# Altium PCB V_9.PcbDoc
Units mm, origin at the board's own origin, x right, y up, seen from the top; angles counter-clockwise.
Board outline 152.4 x 101.6 mm, 2 copper layers (Top Layer, Bottom Layer); 6 components, 12 nets, 99 pads, 1 vias.
Unrouted connection lines stored in the file: 1.
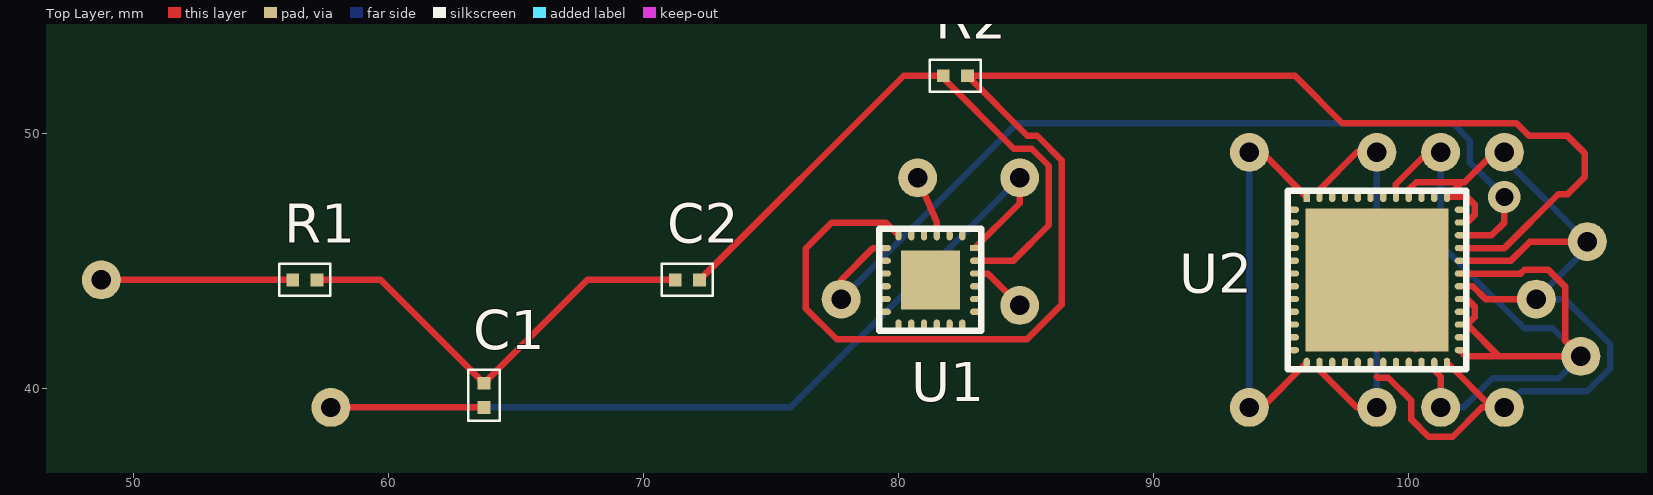
[diagram p0: Top Layer view]
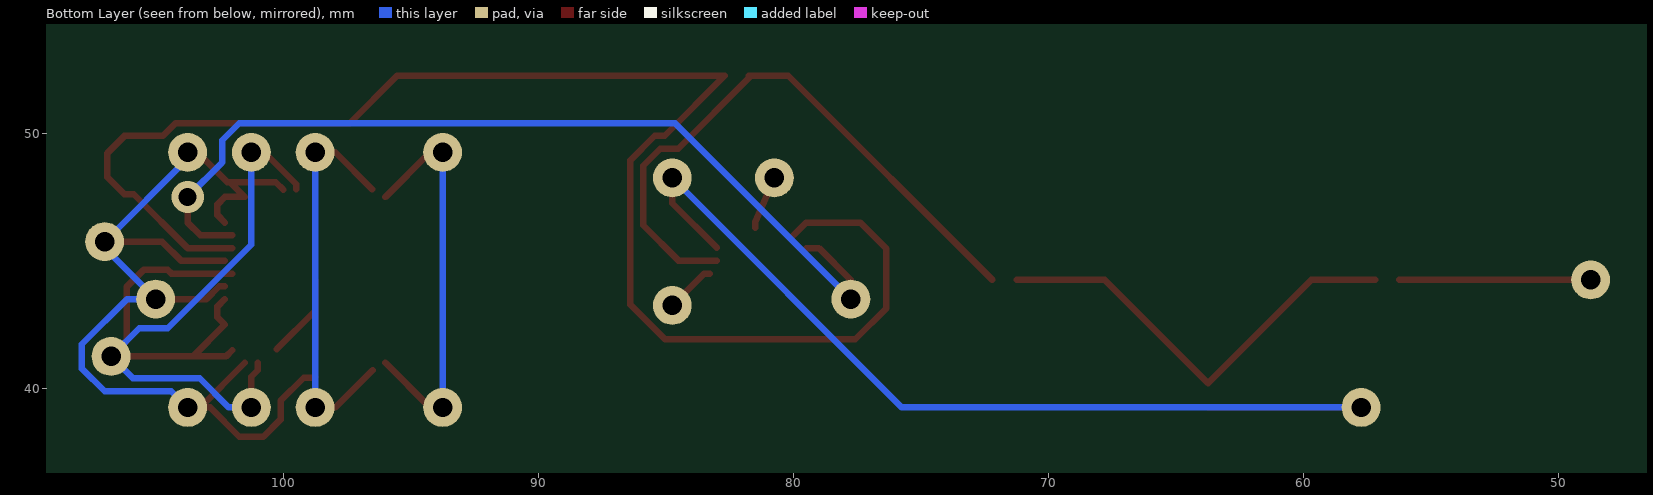
[diagram p1: Bottom Layer view, seen from below]

## Layer stack, top to bottom
Top Layer: signal copper 0.0356
Dielectric: dielectric 0.32, FR-4, Dk 4.8
Bottom Layer: signal copper 0.0356

## Board outline
25.4,25.4 177.8,25.4 177.8,127 25.4,127

## Design rules (kind name [scope] priority, off if disabled: settings)
Clearance [All] p1: gap=0.254
PolygonConnect [All] p1: connectstyle=Relief reliefconductorwidth=0.254 reliefentries=4 polygonreliefangle="90 Angle" airgapwidth=0.254
RoutingVias [All] p1: holewidth=0.711 width=1.27 viastyle="Through Hole" minholewidth=0.711 minwidth=1.27 maxholewidth=0.711 maxwidth=1.27
SilkscreenOverComponentPads [All] p1: minsilkscreentomaskgap=0.254
SolderMaskExpansion [All] p1: expansion=0.102
Width [All] p1: maxlimit=0.254 minlimit=0.254 preferedwidth=0.254
27 further rules are at their usual default settings.

## Classes and differential pairs
component class V_6: C1 C2 R2 U1 U2

## Components (designator, comment, footprint, x,y, rotation, side; value= is the part's Value field where it differs from the comment)
C1 "2 pF" C_0805 63.75,39.25 r90 top
C2 "2 pF" C_0805 71.25,44.25 r0 top
R1 "8.2k" R_0805 56.25,44.25 r0 top
R2 "2.4k" R_0805 81.75,52.25 r0 top
U1 "" ADA4932-2 81.25,44.25 r0 top
U2 "" ads61b49 98.75,44.25 r0 top

## Footprints (in the part's own frame and the unit in brackets; to place one, negate y for a bottom-side part, rotate by r counter-clockwise, add the part's x,y. Pads: shape width x height; smd on the part's side, far side on the other; paste and mask are expansions set on the pad)
ADA4932-2 [mm]
  rect 0.4x0.25 smd: 1(1.75,1.25)
  oval 0.4x0.25 smd: 2(1.75,0.75) 3(1.75,0.25) 4(1.75,-0.25) 5(1.75,-0.75) 6(1.75,-1.25) 13(-1.75,-1.25) 14(-1.75,-0.75) 15(-1.75,-0.25) 16(-1.75,0.25) 17(-1.75,0.75) 18(-1.75,1.25)
  oval 0.25x0.4 smd: 7(1.25,-1.75) 8(0.75,-1.75) 9(0.25,-1.75) 10(-0.25,-1.75) 11(-0.75,-1.75) 12(-1.25,-1.75) 19(-1.25,1.75) 20(-0.75,1.75) 21(-0.25,1.75) 22(0.25,1.75) 23(0.75,1.75) 24(1.25,1.75)
  rect 2.3x2.3 smd: ADA(0,0)
  silkscreen extent -2,-2 2,2
ads61b49 [mm]
  rect 0.25x0.4 smd: 1(-2.75,3.25)
  oval 0.25x0.4 smd: 2(-2.25,3.25) 3(-1.75,3.25) 4(-1.25,3.25) 5(-0.75,3.25) 6(-0.25,3.25) 7(0.25,3.25) 8(0.75,3.25) 9(1.25,3.25) 10(1.75,3.25) 11(2.25,3.25) 12(2.75,3.25) 25(2.75,-3.25) 26(2.25,-3.25) 27(1.75,-3.25) 28(1.25,-3.25) 29(0.75,-3.25) 30(0.25,-3.25) 31(-0.25,-3.25) 32(-0.75,-3.25) 33(-1.25,-3.25) 34(-1.75,-3.25) 35(-2.25,-3.25) 36(-2.75,-3.25)
  oval 0.4x0.25 smd: 13(3.25,2.75) 14(3.25,2.25) 15(3.25,1.75) 16(3.25,1.25) 17(3.25,0.75) 18(3.25,0.25) 19(3.25,-0.25) 20(3.25,-0.75) 21(3.25,-1.25) 22(3.25,-1.75) 23(3.25,-2.25) 24(3.25,-2.75) 37(-3.25,-2.75) 38(-3.25,-2.25) 39(-3.25,-1.75) 40(-3.25,-1.25) 41(-3.25,-0.75) 42(-3.25,-0.25) 43(-3.25,0.25) 44(-3.25,0.75) 45(-3.25,1.25) 46(-3.25,1.75) 47(-3.25,2.25) 48(-3.25,2.75)
  rect 5.6x5.6 smd: 49(0,0)
  silkscreen extent -3.5,-3.5 3.5,3.5
C_0805 [mm]
  rect 0.5x0.5 smd: 1(0,0) 2(0.95,0)
  silkscreen extent -0.53,-0.63 1.48,0.63
R_0805 [mm]
  rect 0.5x0.5 smd: 1(0,0) 2(0.95,0)
  silkscreen extent -0.53,-0.63 1.48,0.63

## Part data
C1 C2: library part C
R1 R2: library part R
U1: library part ADA4932-2
U2: library part ADS61B49

## Free pads (board coordinates)
  round 1.524 hole 0.762: 0(77.75,43.5) GND(57.75,39.25) ""(48.75,44.25) ""(80.75,48.25) ""(84.75,43.25) ""(84.75,48.25) ""(93.75,39.25) ""(93.75,49.25) ""(98.75,39.25) ""(98.75,49.25) ""(101.25,39.25) ""(101.25,49.25) ""(103.75,39.25) ""(103.75,49.25) ""(105,43.5) ""(106.75,41.25) ""(107,45.75)

## Via types
v1: diameter 1.27, hole 0.711, Top Layer to Bottom Layer, 1 vias

## Nets (pads, with @x,y where several pads share a name; then routed paths per layer and width w, separated by ;. In a path a pad name is that pad's centre, name@x,y a point inside that pad or via, vN(x,y) a via of type N, cw(c..) or ccw(c..) an arc to the next point about the centre after c; other vN are vias at no path point)
1.8V: pad.@98.75,39.25 pad.@98.75,49.25 U2.2 U2.35 | length 15.7
  Top Layer w0.254: 96.5,40.709 97.959,39.25 pad.@98.75,39.25 ; 96.506,47.797 97.959,49.25 pad.@98.75,49.25
  Bottom Layer w0.254: pad.@98.75,39.25 pad.@98.75,49.25
3.3V: pad.@101.25,39.25 pad.@101.25,49.25 pad.@106.75,41.25 U2.8 U2.18 U2.20 U2.22 U2.24 U2.26 | length 36.9
  Top Layer w0.254: 99.492,47.799 99.492,48.001 100.741,49.25 pad.@101.25,49.25 ; U2.26 101,40.709 101.25,40.459 pad.@101.25,39.25 ; U2.24@102,41.494 102.244,41.25 103.541,41.25 ; U2.18 104.384,44.5 104.527,44.643 105.473,44.643 106.143,43.973 106.143,41.857 106.75,41.25 103.541,41.25 ; 102.299,43.492 102.581,43.21 102.581,42.79 102.291,42.5 103.541,41.25
  Bottom Layer w0.254: pad.@101.25,39.25 102.134,39.25 103.277,40.393 105.893,40.393 106.75,41.25 105.643,42.357 104.527,42.357 101.25,45.634 pad.@101.25,49.25
5V: pad.@84.75,43.25 U1.3 | length 2
  Top Layer w0.254: 83.291,44.5 83.5,44.5 pad.@84.75,43.25
-5V: pad.@80.75,48.25 U1.22 | length 2.1
  Top Layer w0.254: pad.@80.75,48.25 81.5,46.5 81.5,46.291
AGND: pad.@103.75,39.25 pad.@103.75,49.25 pad.@105,43.5 pad.@107,45.75 U2.9 U2.12 U2.14 U2.17 U2.19 U2.25 U2.49 | length 46.6
  Top Layer w0.254: 98.75,40.459 98.79,40.419 99.197,40.419 100.107,39.509 100.107,38.777 100.777,38.107 101.723,38.107 102.866,39.25 pad.@103.258,39.25 ; U2.49@98.75,41.541 U2.49@98.75,43.041 ; U2.49 U2.49@98.75,43.041 ; 100,47.791 100.29,48.081 102.087,48.081 ; U2.49@100.25,41.541 U2.49@98.75,43.041 ; U2.25@101.508,41 pad.@103.258,39.25 ; 102.291,44 102.509,44 103.009,43.5 pad.@105,43.5 ; 102.291,46.5 102.581,46.79 102.581,47.21 102.285,47.506 101.614,47.506 101.608,47.5 101.506,47.5 102.087,48.081 ; 102.299,44.992 103.992,44.992 104.75,45.75 pad.@107,45.75 ; pad.@103.75,39.25 pad.@103.258,39.25 ; pad.@103.75,49.25 103.358,49.25 102.189,48.081 102.087,48.081
  Bottom Layer w0.254: pad.@103.75,39.25 104.385,39.885 107.001,39.885 107.893,40.777 107.893,41.723 106.116,43.5 105,43.5 107,45.5 107,45.75 103.75,49 pad.@103.75,49.25
DGND: pad.@93.75,39.25 pad.@93.75,49.25 U2.1 U2.36 | length 15.9
  Top Layer w0.254: pad.@93.75,39.25 94.244,39.25 U2.36@95.994,41 ; pad.@93.75,49.25 94.244,49.25 U2.1@95.994,47.5
  Bottom Layer w0.254: pad.@93.75,39.25 pad.@93.75,49.25
GND: C1.1 pad.@84.75,48.25 pad.GND U1.1 | length 40.2
  Top Layer w0.254: pad.GND C1.1 ; U1.1@83,45.506 84.75,47.256 pad.@84.75,48.25
  Bottom Layer w0.254: pad.GND 75.75,39.25 pad.@84.75,48.25
NetC1_2: C1.2 C2.1 R1.2 | length 17.4
  Top Layer w0.254: R1.2 59.7,44.25 C1.2 67.8,44.25 C2.1
NetC2_2: C2.2 R2.1 U1.2 | length 24.3
  Top Layer w0.254: C2.2 80.2,52.25 R2.1 81.75,52.161 84.518,49.393 85.223,49.393 85.893,48.723 85.893,46.393 84.508,45.008 83.372,45.008 ; U1.2 83.364,45
NetR1_1: pad.@48.75,44.25 R1.1 | length 7.5
  Top Layer w0.254: pad.@48.75,44.25 R1.1
NetR2_2: R2.2 U1.19 U2.16 | length 60.9
  Top Layer w0.254: U1.19 79.5,46.5 77.384,46.5 76.357,45.473 76.357,43.143 77.581,41.919 85.035,41.919 86.401,43.285 86.401,48.934 85.434,49.901 85.049,49.901 R2.2 95.541,52.25 97.398,50.393 104.223,50.393 104.723,49.893 106.223,49.893 106.893,49.223 106.893,48.277 106.223,47.607 105.857,47.607 103.75,45.5 U2.16
NetU1_+OUT: pad.0 U1.18 U2.15 | length 36.5
  Top Layer w0.254: pad.0 77.75,44.25 79,45.5 U1.18 ; U2.15 102.008,46.008 103.258,46.008 103.75,46.5 v1(103.75,47.5)
  Bottom Layer w0.254: pad.0 84.643,50.393 101.723,50.393 102.393,49.723 102.393,48.857 v1(103.75,47.5)
pads on no net: U1.4 U1.5 U1.6 U1.7 U1.8 U1.9 U1.10 U1.11 U1.12 U1.13 U1.14 U1.15 U1.16 U1.17 U1.20 U1.21 U1.23 U1.24 U1.ADA U2.3 U2.4 U2.5 U2.6 U2.7 U2.10 U2.11 U2.13 U2.21 U2.23 U2.27 U2.28 U2.29 U2.30 U2.31 U2.32 U2.33 U2.34 U2.37 U2.38 U2.39 U2.40 U2.41 U2.42 U2.43 U2.44 U2.45 U2.46 U2.47 U2.48

## Silkscreen, mask and mechanical layers (free items; w line width, h text height)
Bottom Solder:
  lines w0.254: 43.75,36.25 43.75,56.25 113.75,56.25 113.75,36.25 43.75,36.25